# Altium PCB Buck Converter Rev 2.PcbDoc (part 2 of 2)
Units mil, origin at the board's own origin, x right, y up, seen from the top; angles counter-clockwise.
Board outline 6000 x 4000 mil, 10 copper layers (Top Layer, Int1 (GND), Int2 (Sign), Int3 (GND), Int4 (PWR), Int5 (PWR), Int6 (GND), Int7 (Sign), Int8 (GND), Bottom Layer), stack 61.78 mil thick; 38 components, 750 nets, 114 pads, 68 vias.
Unrouted connection lines stored in the file: 12.
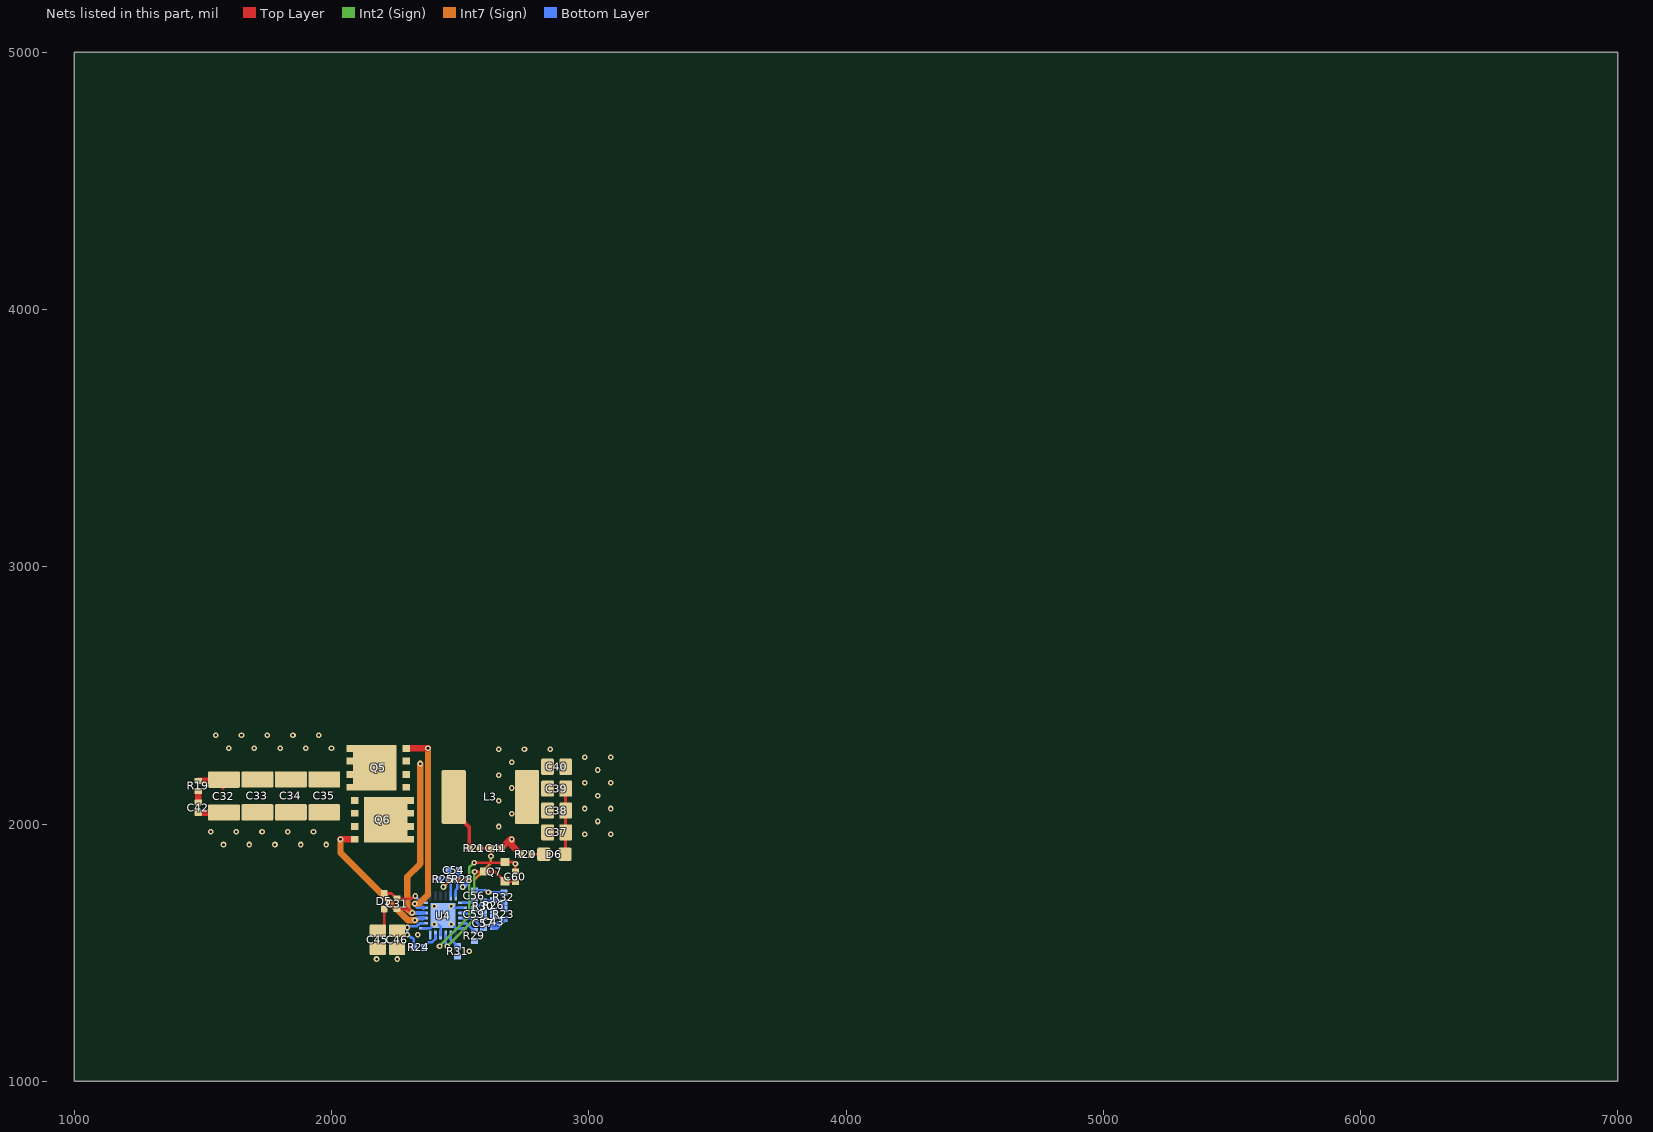
[diagram p10: the nets of this part, all layers, seen from the top]

## Part data
C31 C41: "0.22 µF ±10% 25V Ceramic Capacitor X5R 0402 (1005 Metric)", Capacitance=220nF, Capacitor Type=Ceramic, Manufacturer=Yageo, Manufacturer Part Number=CC0402KRX5R8BB224, Max Operating Temperature=125°C, Min Operating Temperature=-55°C, Negative Tolerance=5, Package Shape=Rectangular, Package Style=SMTMeter, Positive Tolerance=5%, Rated DC Voltage (URdc)=25V, Supplier Part Number 1=311-3341-1-ND, Temperature Characteristics Code=X5R, Category="Ceramic Capacitors", Dielectric Material=Ceramic, Height=0.5mm, JESD-609 Code=e3, Length=1mm, Mount="Surface Mount", Multilayer=Yes, Number of Pins=2, Pricing 1="1=0.10000, 10=0.04000, 50=0.02200, 100=0.01800, 500=0.01288, 1000=0.01012, 2500=0.00920, 5000=0.00846 (USD)", REACH SVHC=Yes, RoHS=Yes, RoHS Compliant=Yes, Size Code=0402, Supplier 1=Digi-Key, Termination=Wraparound, Width=0.5mm
C32 C33 C34 C35: "CAP CER 10UF 50V X7R 1210", Dielectric=X7R, Manufacturer 1="Murata Electronics", Manufacturer Part Number 1=GRM32ER71H106MA12L, Supplier Part Number 1=490-12775-1-ND, Voltage Rating=50V, Supplier 1=Digi-Key
C37 C38 C39 C40 C45 C46: "CAP CER 10UF 16V X5R 0805", Dielectric=X5R, Manufacturer 1=Yageo, Manufacturer Part Number 1=CC0805KKX5R7BB106, Package/Footprint=0805, Supplier Part Number 1=311-1865-1-ND, Voltage Rating=16V, Mounting Type=SMD, Supplier 1=Digi-Key
C42: "±10% 25V Ceramic Capacitor X5R 0402 (1005 Metric)", Capacitance=1uF, Manufacturer 1="TDK Corporation", Manufacturer Part Number 1=C1005X5R1E105K050BE, Package=0402, Supplier Part Number 1=445-175215-1-ND, Voltage=25V, Supplier 1=Digi-Key
C43: "180 pF ±10% 50V Ceramic Capacitor X7R 0402 (1005 Metric)", Capacitance=180pF, Manufacturer 1="AVX Corporation", Manufacturer Part Number 1=04025C181KAT2A, Package=0402, Supplier Part Number 1=478-1092-1-ND, Voltage=50V, Supplier 1=Digi-Key
C54: "100 pF ±10% 50V Ceramic Capacitor X7R 0402 (1005 Metric)", Capacitance=100pF, Manufacturer 1="AVX Corporation", Manufacturer Part Number 1=04025C101KAT2A, Package=0402, Supplier Part Number 1=478-1089-1-ND, Voltage=50V, Supplier 1=Digi-Key
C56: "0.027 µF ±10% 10V Ceramic Capacitor X7R 0402 (1005 Metric)", Capacitance=27nF, Capacitor Type=Ceramic, Manufacturer=Yageo, Manufacturer Part Number=CC0402KRX7R6BB273, Max Operating Temperature=125°C, Min Operating Temperature=-55°C, Negative Tolerance=10%, Package Shape=Rectangular, Package Style=SMTMeter, Rated DC Voltage (URdc)=10V, Supplier Part Number 1=311-3794-1-ND, Temperature Characteristics Code=X7R, Category="Ceramic Capacitors", Dielectric Material=Ceramic, Height=0.5mm, JESD-609 Code=e3, Length=1mm, Mount="Surface Mount", Multilayer=Yes, Number of Pins=2, Positive Tolerance=10%, Pricing 1="1=0.10000, 10=0.04000, 50=0.02200, 100=0.01800, 500=0.01288, 1000=0.01012, 2500=0.00920, 5000=0.00846 (USD)", REACH SVHC=Yes, RoHS=Yes, RoHS Compliant=Yes, Size Code=0402, Supplier 1=Digi-Key, Termination=Wraparound, Width=0.5mm
C57 C60: "1200 pF ±5% 50V Ceramic Capacitor X7R 0402 (1005 Metric)", Capacitance=1.2nF, Capacitor Type=Ceramic, Manufacturer=Yageo, Manufacturer Part Number=CC0402JRX7R9BB122, Max Operating Temperature=125°C, Min Operating Temperature=-55°C, Negative Tolerance=5, Package Shape=Rectangular, Package Style=SMTMeter, Positive Tolerance=5%, Rated DC Voltage (URdc)=50V, Supplier Part Number 1=311-3762-1-ND, Temperature Characteristics Code=X7R, Category="Ceramic Capacitors", Dielectric Material=Ceramic, Height=0.5mm, JESD-609 Code=e3, Length=1mm, Mount="Surface Mount", Multilayer=Yes, Number of Pins=2, Pricing 1="1=0.10000, 10=0.04000, 50=0.02200, 100=0.01800, 500=0.01288, 1000=0.01012, 2500=0.00920, 5000=0.00846 (USD)", REACH SVHC=Yes, RoHS=Yes, RoHS Compliant=Yes, Size Code=0402, Supplier 1=Digi-Key, Termination=Wraparound, Width=0.5mm
C59: "120 pF ±10% 50V Ceramic Capacitor X7R 0402 (1005 Metric)", Capacitance=120pF, Manufacturer 1="AVX Corporation", Manufacturer Part Number 1=04025C121KAT2A, Package=0402, Supplier Part Number 1=478-1090-1-ND, Voltage=50V, Supplier 1=Digi-Key
D5: library part DIO_30V_200mA, "Diode Super Barrier 30 V 200mA Surface Mount SOD-523", Manufacturer 1="Diodes Incorporated", Supplier Part Number 1=SBR0230T5-7TR-ND, Manufacturer Part Number 1=SBR0230T5-7, Supplier 1=Digi-Key
D6: "LED GREEN DIFFUSED 0805 SMD", Forward Voltage Drop=2.2V, Manufacturer 1=OSRAM, Manufacturer Part Number 1="LG R971-KN-1", Package/Footprint=0805, Supplier Part Number 1=475-1410-1-ND, Mounting Type=SMD, Supplier 1=Digi-Key
L3: "FIXED IND 2.2UH 14.5A 9.41 MOHM", Current Rating=14.5A, DC Resistance (DCR)=9.41mOhm, Inductance=2.2μH, Inductance Tolerance=20%, Manufacturer 1="Vishay Dale", Manufacturer Part Number 1=IHLP3232DZER2R2M11, Saturation Current=10.2A, Supplier Part Number 1=541-1350-1-ND, Test Frequency=100kHz, Mounting Type=SMD, Supplier 1=Digi-Key
Q5 Q6: "MOSFET N-CH 30V 60A 8VSON", Manufacturer 1="Texas Instruments", Manufacturer Part Number 1=CSD17577Q5AT, Package/Footprint=8-PowerTDFN, Supplier Part Number 1=296-38337-1-ND, Id=60A, Mounting Type=SMD, Supplier 1=Digi-Key, Vdss=30V, Verified=No, Vgs (Max)=±20V
Q7: "Bipolar (BJT) Transistor NPN 40 V 600 mA 250MHz 310 mW Surface Mount SOT-23-3", Current - Collector (Ic) (Max)=600mA, Current - Collector Cutoff (Max)=100nA, Frequency - Transition=250MHz, Manufacturer 1="Diodes Incorporated", Supplier Part Number 1=MMBT4401-FDICT-ND, Manufacturer Part Number 1=MMBT4401-7-F, Supplier 1=Digi-Key, Vce Saturation (Max) @ Ib, Ic="750mV @ 50mA, 500mA"
R19: "RES 2.21 OHM 1% 1/16W 0402", Manufacturer 1=Yageo, Manufacturer Part Number 1=RMCF0402FT2R21, Package/Footprint=0402, Power="0.063W, 1/16W", Supplier Part Number 1=RMCF0402FT2R21CT-ND, Tolerance=1%, Mounting Type=SMD, Supplier 1=Digi-Key
R20: "Fixed Resistor, Metal Glaze/thick Film, 0.063W, 1000ohm, 50V, 1% +/-Tol, 100ppm/Cel, Surface Mount, 0402", Manufacturer="Stackpole Electronics", Manufacturer Part Number=RMCF0402FT1K00, Max Operating Temperature=155°C, Min Operating Temperature=-55°C, Package Height=0.3mm, Package Length=1mm, Package Shape=Rectangular, Package Style=SMTMeter, Package Width=0.5mm, Rated Power Dissipation (P)=63mW, Rated Temperature=70°C, Resistance=1kΩ, Resistor Type="FIXED RESISTOR", Supplier Part Number 1=RMCF0402FT1K00CT-ND, Temperature Coefficient=100ppm/°C, Tolerance=1%, Working Voltage=50V, Category="Chip SMD Resistors", ComponentLink1Description=https://datasheet.ciiva.com:443/pdfs/VipMasterIC/IC/SEIE/SEIE-S-A0009541969/SEIE-S-A0009541969-1.pdf?src-supplier=IHS+Markit, ComponentLink1URL=https://datasheet.ciiva.com:443/pdfs/VipMasterIC/IC/SEIE/SEIE-S-A0009541969/SEIE-S-A0009541969-1.pdf?src-supplier=IHS+Markit, ComponentLink2Description=https://datasheet.ciiva.com/15193/getdatasheetpartid-365385-15193418.pdf?src-supplier=Verical, ComponentLink2URL=https://datasheet.ciiva.com/15193/getdatasheetpartid-365385-15193418.pdf?src-supplier=Verical, ComponentLink3Description=https://datasheet.ciiva.com/24336/sei-rmcp-24336266.pdf?src-supplier=Onlinecomponents.com, ComponentLink3URL=https://datasheet.ciiva.com/24336/sei-rmcp-24336266.pdf?src-supplier=Onlinecomponents.com, Construction=Rectangular, JESD-609 Code=e3, Mount="Surface Mount", Number of Pins=2, Packaging="Tape and Reel", Pricing 1="1=0.10000, 10=0.01500, 100=0.00610, 1000=0.00274, 2500=0.00238, 5000=0.00197 (USD)", REACH SVHC=Yes, Reference Standard=AEC-Q200, RoHS=Yes, RoHS Compliant=Yes, Size Code=0402, Stock 1=277, Supplier 1=Digi-Key, Technology="METAL GLAZE/THICK FILM", Terminal Finish=Nickel, Termination=Wraparound
R21: "RES SMD 845 OHM 1% 1/16W 0402", Manufacturer 1="Vishay Dale", Manufacturer Part Number 1=CRCW0402845RFKED, Package/Footprint=0402, Power="0.063W, 1/16W", Supplier Part Number 1=541-845LCT-ND, Tolerance=1%, Mounting Type=SMD, Supplier 1=Digi-Key
R23: "RES SMD 20K OHM 1% 1/16W 0402", Manufacturer 1=Yageo, Manufacturer Part Number 1=RC0402FR-0720KL, Package/Footprint=0402, Power="0.063W, 1/16W", Supplier Part Number 1=311-20.0KLRCT-ND, Tolerance=1%, Mounting Type=SMD, Supplier 1=Digi-Key
R24: "RES SMD 56.2K OHM 1% 1/16W 0402", Manufacturer 1=Yageo, Manufacturer Part Number 1=RC0402FR-0756K2L, Package/Footprint=0402, Power="0.063W, 1/16W", Supplier Part Number 1=YAG3187CT-ND, Tolerance=1%, Mounting Type=SMD, Supplier 1=Digi-Key
R25 R28: "RES 7.87K OHM 1% 1/16W 0402", Manufacturer 1="Vishay Dale", Manufacturer Part Number 1=RMCF0402FT7K87, Package/Footprint=0402, Power="0.063W, 1/16W", Supplier Part Number 1=RMCF0402FT7K87CT-ND, Tolerance=1%, Mounting Type=SMD, Supplier 1=Digi-Key
R26: "RES SMD 124 OHM 1% 1/16W 0402", Manufacturer 1="Vishay Dale", Manufacturer Part Number 1=RC0402FR-07124RL, Package/Footprint=0402, Power="0.063W, 1/16W", Supplier Part Number 1=311-124LRCT-ND, Tolerance=1%, Mounting Type=SMD, Supplier 1=Digi-Key
R29: "RES 11K OHM 1% 1/16W 0402", Manufacturer 1="Stackpole Electronics Inc", Manufacturer Part Number 1=RMCF0402FT11K0, Package/Footprint=0402, Power="0.063W, 1/16W", Supplier Part Number 1=RMCF0402FT11K0CT-ND, Tolerance=1%, Mounting Type=SMD, Supplier 1=Digi-Key
R30: "RES SMD 3.48K OHM 1% 1/16W 0402", Manufacturer 1="Vishay Dale", Manufacturer Part Number 1=RC0402FR-073K48L, Package/Footprint=0402, Power="0.063W, 1/16W", Supplier Part Number 1=YAG3148CT-ND, Tolerance=1%, Mounting Type=SMD, Supplier 1=Digi-Key
R31: "RES SMD 86.6K OHM 1% 1/16W 0402", Manufacturer 1=Yageo, Manufacturer Part Number 1=RC0402FR-0786K6L, Package/Footprint=0402, Power="0.063W, 1/16W", Supplier Part Number 1=YAG3249CT-ND, Tolerance=1%, Mounting Type=SMD, Supplier 1=Digi-Key
R32: "RES 4.42K OHM 1% 1/16W 0402", Manufacturer 1="Stackpole Electronics Inc", Manufacturer Part Number 1=RMCF0402FT4K42, Package/Footprint=0402, Power="0.063W, 1/16W", Supplier Part Number 1=RMCF0402FT4K42CT-ND, Tolerance=1%, Mounting Type=SMD, Supplier 1=Digi-Key
U4: "Buck Regulator Positive Output Step-Down - DC-DC Controller IC 24-WQFN (4x4)", Manufacturer 1="Texas Instruments", Package="24-WQFN Exposed Pad", Supplier Part Number 1=296-37066-1-ND, Supply Voltage="3V - 20V", Switching Frequency="200kHz - 1.2MHz", Manufacturer Part Number 1=LM27403SQE/NOPB, Max Duty Cycle=93%, Supplier 1=Digi-Key

## Via types
v1: diameter 22, hole 10, Top Layer to Bottom Layer, 68 vias

## Nets (pads, with @x,y where several pads share a name; then routed paths per layer and width w, separated by ;. In a path a pad name is that pad's centre, name@x,y a point inside that pad or via, vN(x,y) a via of type N, cw(c..) or ccw(c..) an arc to the next point about the centre after c; other vN are vias at no path point)
1.8V: 
1V2: 
1V8: 
2V5: 
3V3: C37.2 C38.2 C39.2 C40.2 C41.2 C43.2 L3.1 R20.2 R23.2 R28.2 | length 217.7
  Top Layer w25: C41.2@2660.32,1905 2660.32,1905.59 2694.72,1940 v1(2700,1940) 2700,1918.31 2733.9,1884.41 2734.49,1884.41 2735.87,1883.03 R20.2@2735.87,1882.44
  Bottom Layer w25: v1(2510,1755) 2510,1756.8 2518.63,1765.42 2518.63,1773.35 2529.68,1784.41 R28.2@2529.68,1785 ; C43.2@2630,1600.63 2630.69,1601.32 2640.41,1601.32 2669.41,1630.32 R23.2@2670,1630.32
  other v1: 2650,1990 2700,2040 2650,2090 2700,2140 2650,2190 2700,2240 2650,2290 2750,2290 2850,2290
3V3OUT: 
5V: 
5V_HDMI: 
5V_USB1: 
5V_USB2: 
+RTC_AGX: 
CANA_N: 
CANA_P: 
CANB_N: 
CANB_P: 
CBOOT: C31.1 D5.1 U4.18 | length 179.9
  Top Layer w10: D5.1@2205,1729.92 2232.8,1729.92 2253.03,1709.68 C31.1@2255,1709.68 2311.44,1709.68 2321.75,1720 v1(2325,1720)
  Bottom Layer w10: v1(2325,1720) 2344.72,1700.28 2344.72,1693.54 2344.84,1693.43 U4.18@2357.24,1693.43
CHASSIS: 
FGND: 
GND: C32.1 C33.1 C34.1 C35.1 C37.1 C38.1 C39.1 C40.1 C42.1 C45.1 C46.1 C56.1 C60.1 D6.2 Q6.1 Q7.2 R29.1 R31.1 R32.1 U4.2 U4.6 U4.10 U4.13 U4.25 | length 1258.2
  Top Layer w10: C32.1@1581.14,2043.61 C32.1@1581.85,2044.32 ; v1(2555,1850) 2671.97,1850 Q7.2@2674.37,1852.4 2704.35,1852.4 2711.75,1845 v1(2715,1845) C60.1@2715,1814.68 ; D6.2@2907.91,1882.44 2909.47,1884 2909.47,2136.67 C39.1@2910.24,2137.44
  Top Layer w25: C42.1@1481.85,2043.61 C32.1@1581.14,2043.61
  Int2 (Sign) w10: v1(2420,1525) 2535,1640 2535,1830 v1(2555,1850)
  Bottom Layer w10: U4.13@2357.24,1595 2384.54,1595 2390.39,1600.86 2390.39,1600.98 2399.41,1610 v1(2400,1610) 2414.76,1610 2423.78,1600.98 U4.10@2423.78,1567.83 ; v1(2465,1610) 2467.83,1610 2476.85,1600.98 2476.85,1600.86 2482.71,1595 U4.6@2510,1595 ; v1(2465,1680) 2471.26,1673.74 U4.2@2510,1673.74 ; C56.1@2555,1741.68 2600.07,1741.68 2606.75,1735 v1(2610,1735) 2610.32,1734.68 2669.68,1734.68 R32.1@2670,1734.37
  other v1: 2175,1475 2255,1475 2535,1505 2335,1570 2433.62,1644.21 2400,1680 1580,1920 1680,1920 1780,1920 1880,1920 1980,1920 2985,1960 3085,1960 1530,1970 1630,1970 1730,1970 1830,1970 1930,1970 3035,2010 2985,2060 3085,2060 3035,2110 2985,2160 3085,2160 3035,2210 2985,2260 3085,2260
GPIO20_5V0_HDMI_EN: 
I2C_GP2_CLK_3V3: 
I2C_GP2_DAT_3V3: 
I2C_GP5_CLK_3V3: 
I2C_GPS_DAT_3V3: 
MODE0: 
MODE1: 
MODE2: 
MODE3: 
NetC2_1: 
NetC2_2: 
NetC10_1: 
NetC10_2: 
NetC11_1: 
NetC12_2: 
NetC13_1: 
NetC14_1: 
NetC15_2: 
NetC23_2: 
NetC24_1: 
NetC24_2: 
NetC25_2: 
NetC26_2: 
NetC27_1: 
NetC27_2: 
NetC28_2: 
NetC29_2: 
NetC30_2: 
NetC36_1: 
NetC36_2: 
NetC41_1: C41.1 R21.2 R25.2 | length 364.2
  Top Layer w10: R21.2@2575,1905 C41.1@2620.95,1905 2620.47,1904.53 2620.47,1875.47 v1(2620,1875)
  Int7 (Sign) w10: v1(2435,1755) 2462.54,1782.54 2553.23,1782.54 2619.7,1849 2619.7,1874.7 v1(2620,1875)
  Bottom Layer w10: R25.2@2415.32,1785 2415.32,1783.03 2432.7,1765.64 2432.7,1757.3 v1(2435,1755)
NetC42_2: C42.2 R19.1 U4.12 | length 45.3
  Top Layer w25: C42.2@1481.85,2082.98 R19.1@1481.85,2128.29
NetC43_1: C43.1 R26.2 | length 25
  Bottom Layer w10: C43.1@2630,1640 R26.2@2630,1665
NetC44_1: 
NetC53_2: 
NetC54_1: C54.1 R28.1 U4.24 | length 104.3
  Bottom Layer w10: U4.24@2482.83,1720.59 2482.95,1720.71 2482.95,1743.25 2488.5,1748.8 2488.5,1783.18 2492.5,1787.18 2492.5,1817.82 C54.1@2494.68,1820
NetC54_2: C54.2 R25.1 U4.23 | length 103.2
  Bottom Layer w10: C54.2@2455.32,1820 2455,1819.68 2455,1785.32 R25.1@2454.68,1785 2454.68,1783.03 2463.15,1774.57 U4.23@2463.15,1720.59
NetC55_2: 
NetC56_2: C56.2 U4.1 | length 48.7
  Bottom Layer w10: U4.1@2510,1693.43 2544.14,1693.43 2553.03,1702.32 C56.2@2555,1702.32
NetC57_1: C57.1 C59.1 U4.4 | length 98.5
  Bottom Layer w10: U4.4@2510,1634.37 2510.12,1634.25 2551.06,1634.25 C59.1@2555,1630.32 2556.97,1630.32 2563.78,1623.5 2563.78,1619.57 2588.03,1595.32 C57.1@2590,1595.32
NetC57_2: C57.2 R30.1 | length 25.3
  Bottom Layer w10: C57.2@2590,1634.68 R30.1@2590,1660
NetC58_2: R31.2 U4.8 | length 55.4
  Bottom Layer w10: U4.8@2463.15,1567.83 2463.27,1567.72 2463.27,1551.42 2481.22,1533.46 2481.22,1531.5 2488.03,1524.68 R31.2@2490,1524.68
NetC59_2: C59.2 R23.1 R26.1 R30.2 R32.2 U4.3 | length 212
  Bottom Layer w10: U4.3@2510,1654.06 2539.37,1654.06 2546.22,1660.91 2546.22,1662.87 2553.03,1669.68 C59.2@2555,1669.68 2556.97,1669.68 2568.79,1681.5 2571.47,1681.5 2581.22,1691.25 2581.22,1692.56 2588.03,1699.37 R30.2@2590,1699.37 2592.5,1701.87 2627.5,1701.87 R26.1@2630,1704.37 2658.66,1704.37 2668.03,1695 R32.2@2670,1695 R23.1@2670,1669.68
NetC60_2: C60.2 Q7.1 Q7.3 U4.9 | length 554.9
  Top Layer w10: v1(2556,1815) Q7.3@2595.63,1815 2635,1815 2672.4,1777.6 Q7.1@2674.37,1777.6 2676.65,1775.32 C60.2@2715,1775.32
  Int2 (Sign) w10: v1(2449.99,1524.99) 2555,1630 2555,1814 v1(2556,1815)
  Bottom Layer w10: U4.9@2443.46,1567.83 2443.46,1533.43 2449.99,1526.9 v1(2449.99,1524.99)
NetC129_2: 
NetC134_2: 
NetC154_2: 
NetC155_2: 
NetC156_2: 
NetC159_1: 
NetC160_1: 
NetC164_1: 
NetC165_1: 
NetC183_2: 
NetC184_2: 
NetC185_2: 
NetC186_2: 
NetC187_2: 
NetC188_2: 
NetC211_2: 
NetC212_2: 
NetC213_2: 
NetC214_2: 
NetC217_2: 
NetC252_2: 
NetC268_2: 
NetD1_1: 
NetD2_1: 
NetD4_1: 
NetD6_1: D6.1 R20.1 | length 50
  Top Layer w10: R20.1@2775.24,1882.44 D6.1@2825.24,1882.44
NetD7_2: 
NetD9_3: 
NetD12_1: 
NetD12_3: 
NetD13_1: 
NetD13_2: 
NetD13_4: 
NetD13_5: 
NetD13_7: 
NetD13_8: 
NetD13_10: 
NetD13_11: 
NetD13_15: 
NetD13_17: 
NetD14_2: 
NetD15_1: 
NetD16_1: 
NetJ5_13: 
NetJ5_14: 
NetJ5_15: 
NetJ5_16: 
NetJ5_17: 
NetJ6_14: 
NetJ6_16: 
NetJ7_8: 
NetJ7_10: 
NetJ7_12: 
NetJ7_14: 
NetJ7_21: 
NetJ7_23: 
NetJ7_38: 
NetJ7_56: 
NetJ7_59: 
NetJ7_62: 
NetJ8_5: 
NetJ8_7: 
NetJ8_10: 
NetJ8_11: 
NetJ8_13: 
NetJ8_17: 
NetJ8_19: 
NetJ8_23: 
NetJ8_25: 
NetJ8_29: 
NetJ8_31: 
NetJ8_35: 
NetJ8_37: 
NetJ8_41: 
NetJ8_43: 
NetJ8_47: 
NetJ8_49: 
NetJ8_50: 
NetJ8_52: 
NetJ8_53: 
NetJ8_54: 
NetJ8_55: 
NetJ9_16: 
NetL5_1: 
NetP1_A53: 
NetP1_C53: 
NetQ2_2: 
NetQ3_2: 
NetQ5_2: Q5.2 U4.17 | length 761.9
  Top Layer w25: Q5.2@2290.06,2293.92 2373.92,2293.92 v1(2375,2295)
  Int7 (Sign) w25: v1(2323.72,1690) 2339.7,1690 2375,1725.31 v1(2375,2295)
  Bottom Layer w15: v1(2323.72,1690) 2323.72,1688.79 2336.4,1676.12 2354.86,1676.12 U4.17@2357.24,1673.74
NetQ6_2: Q6.2 U4.15 | length 542.5
  Top Layer w25: v1(2035,1940) 2035.49,1940.49 Q6.2@2090,1940.49
  Int7 (Sign) w25: v1(2035,1940) 2035,1888.36 2297.36,1626 2324.25,1626 v1@2325.53,1626
  Bottom Layer w15: v1(2324.25,1626) 2326.15,1626 2332.14,1631.99 2354.86,1631.99 U4.15@2357.24,1634.37
NetQ8_1: 
NetQ8_3: 
NetQ9_1: 
NetQ11_1: 
NetQ11_3: 
NetQ14_3: 
NetQ15_2: 
NetR1_1: 
NetR3_1: 
NetR10_2: 
NetR15_2: 
NetR24_2: R24.2 U4.11 | length 74.1
  Bottom Layer w10: R24.2@2359.68,1520 2359.68,1521.97 2377.98,1540.27 2391.46,1540.27 2403.98,1552.79 2403.98,1567.72 U4.11@2404.09,1567.83
NetR29_2: R29.2 U4.5 | length 58.5
  Bottom Layer w10: U4.5@2510,1614.68 2522.4,1614.68 2527.97,1609.12 2530.5,1609.12 2546.22,1593.4 2546.22,1591.5 2553.03,1584.68 R29.2@2555,1584.68
NetR48_1: 
NetR49_2: 
NetR50_2: 
NetR51_2: 
NetR53_1: 
NetR54_1: 
NetR55_1: 
NetR56_1: 
NetR78_1: 
NetR79_1: 
NetR80_1: 
NetR85_1: 
NetR88_1: 
NetR90_2: 
NetR91_2: 
NetR92_1: 
NetR93_2: 
NetR94_1: 
NetR95_2: 
NetR96_2: 
NetR97_2: 
NetR98_2: 
NetR99_2: 
NetR100_2: 
NetR106_2: 
NetR107_2: 
NetR108_2: 
NetR109_2: 
NetR116_1: 
NetR132_1: 
NetR139_1: 
NetR167_1: 
NetR168_1: 
NetR169_1: 
NetR174_2: 
NetR175_2: 
NetR176_2: 
NetR177_2: 
NetR178_1: 
NetR179_1: 
NetR180_1: 
NetR183_1: 
NetR184_2: 
NetR187_2: 
NetU9_47: 
NetU11_46: 
NetU12_10: 
NetU12_11: 
NetU12_12: 
NetU12_13: 
NetU13_4: 
NetU14_2: 
NetU14_3: 
NetU21_3: 
NetU23_3: 
NetU23_4: 
NetU23_5: 
NV0HS0.RX_N: 
NV0HS0.RX_P: 
NV0HS0.TX_N: 
NV0HS0.TX_P: 
NV0HS0_TX_N: 
NV0HS0_TX_P: 
NV0HS1.RX_N: 
NV0HS1.RX_P: 
NV0HS1.TX_N: 
NV0HS1.TX_P: 
NV0HS1_TX_N: 
NV0HS1_TX_P: 
NV0HS2.RX_N: 
NV0HS2.RX_P: 
NV0HS2.TX_N: 
NV0HS2.TX_P: 
NV0HS2_TX_N: 
NV0HS2_TX_P: 
NV0HS3.RX_N: 
NV0HS3.RX_P: 
NV0HS3.TX_N: 
NV0HS3.TX_P: 
NV0HS3_TX_N: 
NV0HS3_TX_P: 
NV0HS4.RX_N: 
NV0HS4.RX_P: 
NV0HS4.TX_N: 
NV0HS4.TX_P: 
NV0HS4_TX_N: 
NV0HS4_TX_P: 
NV0HS5.RX_N: 
NV0HS5.RX_P: 
NV0HS5.TX_N: 
NV0HS5.TX_P: 
NV0HS5_TX_N: 
NV0HS5_TX_P: 
NV0HS6.RX_N: 
NV0HS6.RX_P: 
NV0HS6.TX_N: 
NV0HS6.TX_P: 
NV0HS6_TX_N: 
NV0HS6_TX_P: 
NV0HS7.RX_N: 
NV0HS7.RX_P: 
NV0HS7.TX_N: 
NV0HS7.TX_P: 
NV0HS7_TX_N: 
NV0HS7_TX_P: 
NV0HS_CLK0.REFCLK_N: 
NV0HS_CLK0.REFCLK_P: 
NV0HS_CLK1.REFCLK_N: 
NV0HS_CLK1.REFCLK_P: 
NV1HS0.RX_N: 
NV1HS0.RX_P: 
NV1HS0.TX_N: 
NV1HS0.TX_P: 
NV1HS0_TX_N: 
NV1HS0_TX_P: 
NV1HS1.RX_N: 
NV1HS1.RX_P: 
NV1HS1.TX_N: 
NV1HS1.TX_P: 
NV1HS1_TX_N: 
NV1HS1_TX_P: 
NV1HS2.RX_N: 
NV1HS2.RX_P: 
NV1HS2.TX_N: 
NV1HS2.TX_P: 
NV1HS2_TX_N: 
NV1HS2_TX_P: 
NV1HS3.RX_N: 
NV1HS3.RX_P: 
NV1HS3.TX_N: 
NV1HS3.TX_P: 
NV1HS3_TX_N: 
NV1HS3_TX_P: 
NV1HS4.RX_N: 
NV1HS4.RX_P: 
NV1HS4.TX_N: 
NV1HS4.TX_P: 
NV1HS4_TX_N: 
NV1HS4_TX_P: 
NV1HS5.RX_N: 
NV1HS5.RX_P: 
NV1HS5.TX_N: 
NV1HS5.TX_P: 
NV1HS5_TX_N: 
NV1HS5_TX_P: 
NV1HS6.RX_N: 
NV1HS6.RX_P: 
NV1HS6.TX_N: 
NV1HS6.TX_P: 
NV1HS6_TX_N: 
NV1HS6_TX_P: 
NV1HS7.RX_N: 
NV1HS7.RX_P: 
NV1HS7.TX_N: 
NV1HS7.TX_P: 
NV1HS7_TX_N: 
NV1HS7_TX_P: 
NV1HS_CLK0.REFCLK_N: 
NV1HS_CLK0.REFCLK_P: 
NV1HS_CLK1.REFCLK_N: 
NV1HS_CLK1.REFCLK_P: 
NV_CAM_MCLK1: 
NV_CAM_MCLK2: 
NV_CAM_MCLK3: 
NV_CAM_MCLK4: 
NV_CAM_MCLK5: 
NV_CAN0.DATA_IN: 
NV_CAN0.DATA_OUT: 
NV_CAN1.DATA_IN: 
NV_CAN1.DATA_OUT: 
NV_CSI0.CLK_N: 
NV_CSI0.CLK_P: 
NV_CSI0.DATA0_N: 
NV_CSI0.DATA0_P: 
NV_CSI0.DATA1_N: 
NV_CSI0.DATA1_P: 
NV_CSI1.CLK_N: 
NV_CSI1.CLK_P: 
NV_CSI1.DATA0_N: 
NV_CSI1.DATA0_P: 
NV_CSI1.DATA1_N: 
NV_CSI1.DATA1_P: 
NV_CSI2.CLK_N: 
NV_CSI2.CLK_P: 
NV_CSI2.DATA0_N: 
NV_CSI2.DATA0_P: 
NV_CSI2.DATA1_N: 
NV_CSI2.DATA1_P: 
NV_CSI3.CLK_N: 
NV_CSI3.CLK_P: 
NV_CSI3.DATA0_N: 
NV_CSI3.DATA0_P: 
NV_CSI3.DATA1_N: 
NV_CSI3.DATA1_P: 
NV_CSI4.CLK_N: 
NV_CSI4.CLK_P: 
NV_CSI4.DATA0_N: 
NV_CSI4.DATA0_P: 
NV_CSI4.DATA1_N: 
NV_CSI4.DATA1_P: 
NV_CSI5.CLK_N: 
NV_CSI5.CLK_P: 
NV_CSI5.DATA0_N: 
NV_CSI5.DATA0_P: 
NV_CSI5.DATA1_N: 
NV_CSI5.DATA1_P: 
NV_CSI6.CLK_N: 
NV_CSI6.CLK_P: 
NV_CSI6.DATA0_N: 
NV_CSI6.DATA0_P: 
NV_CSI6.DATA1_N: 
NV_CSI6.DATA1_P: 
NV_CSI7.CLK_N: 
NV_CSI7.CLK_P: 
NV_CSI7.DATA0_N: 
NV_CSI7.DATA0_P: 
NV_CSI7.DATA1_N: 
NV_CSI7.DATA1_P: 
NV_DBG_SEL: 
NV_DP0.AUX_N: 
NV_DP0.AUX_P: 
NV_DP0.HPD: 
NV_DP0.TX0_N: 
NV_DP0.TX0_P: 
NV_DP0.TX1_N: 
NV_DP0.TX1_P: 
NV_DP0.TX2_N: 
NV_DP0.TX2_P: 
NV_DP0.TX3_N: 
NV_DP0.TX3_P: 
NV_DP1.AUX_N: 
NV_DP1.AUX_P: 
NV_DP1.HPD: 
NV_DP1.TX0_N: 
NV_DP1.TX0_P: 
NV_DP1.TX1_N: 
NV_DP1.TX1_P: 
NV_DP1.TX2_N: 
NV_DP1.TX2_P: 
NV_DP1.TX3_N: 
NV_DP1.TX3_P: 
NV_DP2.AUX_N: 
NV_DP2.AUX_P: 
NV_DP2.HPD: 
NV_DP2.TX0_N: 
NV_DP2.TX0_P: 
NV_DP2.TX1_N: 
NV_DP2.TX1_P: 
NV_DP2.TX2_N: 
NV_DP2.TX2_P: 
NV_DP2.TX3_N: 
NV_DP2.TX3_P: 
NV_DP2_HPD: 
NV_FAN.PWM: 
NV_FAN.TACH: 
NV_GPIO.GPIO01: 
NV_GPIO.GPIO02: 
NV_GPIO.GPIO03: 
NV_GPIO.GPIO04: 
NV_GPIO.GPIO05: 
NV_GPIO.GPIO06: 
NV_GPIO.GPIO07: 
NV_GPIO.GPIO08: 
NV_GPIO.GPIO09: 
NV_GPIO.GPIO10: 
NV_GPIO.GPIO11: 
NV_GPIO.GPIO12: 
NV_GPIO.GPIO13: 
NV_GPIO.GPIO14: 
NV_GPIO.GPIO15: 
NV_GPIO.GPIO16: 
NV_GPIO.GPIO17: 
NV_GPIO.GPIO18: 
NV_GPIO.GPIO19: 
NV_GPIO.GPIO20: 
NV_GPIO.GPIO21: 
NV_GPIO.GPIO22: 
NV_GPIO.GPIO23: 
NV_GPIO.GPIO24: 
NV_GPIO.GPIO25: 
NV_GPIO.GPIO26: 
NV_GPIO.GPIO27: 
NV_GPIO.GPIO28: 
NV_GPIO.GPIO29: 
NV_GPIO.GPIO30: 
NV_GPIO.GPIO31: 
NV_GPIO.GPIO32: 
NV_GPIO.GPIO33: 
NV_GPIO.GPIO34: 
NV_GPIO.GPIO35: 
NV_GPIO.GPIO36: 
NV_HDMI_CEC: 
NV_HDMI_CEC_CON: 
NV_HDMI_DDC_CLK: 
NV_HDMI_DDC_DATA: 
NV_HDMI_TMDS0_N: 
NV_HDMI_TMDS0_P: 
NV_HDMI_TMDS1_N: 
NV_HDMI_TMDS1_P: 
NV_HDMI_TMDS2_N: 
NV_HDMI_TMDS2_P: 
NV_HDMI_TMDSCLK_N: 
NV_HDMI_TMDSCLK_P: 
NV_I2C1.CLK: 
NV_I2C1.DATA: 
NV_I2C2.CLK: 
NV_I2C2.DATA: 
NV_I2C3.CLK: 
NV_I2C3.DATA: 
NV_I2C4.CLK: 
NV_I2C4.DATA: 
NV_I2S0.CLK: 
NV_I2S0.DATA_IN: 
NV_I2S0.DATA_OUT: 
NV_I2S0.FRAME_SYNC: 
NV_I2S1.CLK: 
NV_I2S1.DATA_IN: 
NV_I2S1.DATA_OUT: 
NV_I2S1.FRAME_SYNC: 
NV_I2S2.CLK: 
NV_I2S2.DATA_IN: 
NV_I2S2.DATA_OUT: 
NV_I2S2.FRAME_SYNC: 
NV_JTAG.TCK: 
NV_JTAG.TDI: 
NV_JTAG.TDO: 
NV_JTAG.TMS: 
NV_JTAG.TRST_N: 
NV_JTAG_SEL: 
NV_MOD_PRSNT.PRSNT_OUT: 
NV_PCIE_CTRL0.CLK_N: 
NV_PCIE_CTRL0.CLK_P: 
NV_PCIE_CTRL0.CLKREQ_N: 
NV_PCIE_CTRL0.RST_N: 
NV_PCIE_CTRL1.CLK_N: 
NV_PCIE_CTRL1.CLK_P: 
NV_PCIE_CTRL1.CLKREQ_N: 
NV_PCIE_CTRL1.RST_N: 
NV_PCIE_CTRL2.CLK_N: 
NV_PCIE_CTRL2.CLK_P: 
NV_PCIE_CTRL2.CLKREQ_N: 
NV_PCIE_CTRL2.RST_N: 
NV_PCIE_CTRL3.CLK_N: 
NV_PCIE_CTRL3.CLK_P: 
NV_PCIE_CTRL3.CLKREQ_N: 
NV_PCIE_CTRL3.RST_N: 
NV_PCIE_CTRL4.CLK_N: 
NV_PCIE_CTRL4.CLK_P: 
NV_PCIE_CTRL4.CLKREQ_N: 
NV_PCIE_CTRL4.RST_N: 
NV_PCIE_CTRL5.CLK_N: 
NV_PCIE_CTRL5.CLK_P: 
NV_PCIE_CTRL5.CLKREQ_N: 
NV_PCIE_CTRL5.RST_N: 
NV_PCIE_WAKE_N: 
NV_PWM01: 
NV_RGMII.INT_N: 
NV_RGMII.MDC: 
NV_RGMII.MDIO: 
NV_RGMII.RST_N: 
NV_RGMII.RX_CLK: 
NV_RGMII.RX_DATA0: 
NV_RGMII.RX_DATA1: 
NV_RGMII.RX_DATA2: 
NV_RGMII.RX_DATA3: 
NV_RGMII.RX_EN: 
NV_RGMII.TX_CLK: 
NV_RGMII.TX_DATA0: 
NV_RGMII.TX_DATA1: 
NV_RGMII.TX_DATA2: 
NV_RGMII.TX_DATA3: 
NV_RGMII.TX_EN: 
NV_SDIO.CLK: 
NV_SDIO.CMD: 
NV_SDIO.DATA0: 
NV_SDIO.DATA1: 
NV_SDIO.DATA2: 
NV_SDIO.DATA3: 
NV_SPI1.CLK: 
NV_SPI1.CS0_N: 
NV_SPI1.CS1_N: 
NV_SPI1.MISO: 
NV_SPI1.MOSI: 
NV_SPI2.CLK: 
NV_SPI2.CS0_N: 
NV_SPI2.MISO: 
NV_SPI2.MOSI: 
NV_SPI3.CLK: 
NV_SPI3.CS0_N: 
NV_SPI3.CS1_N: 
NV_SPI3.MISO: 
NV_SPI3.MOSI: 
NV_SYS.CARRIER_PWR_ON: 
NV_SYS.FORCE_RECOV_N: 
NV_SYS.MODULE_PWR_ON: 
NV_SYS.OVERTEMP_N: 
NV_SYS.PWR_BTN_N: 
NV_SYS.PWR_GOOD: 
NV_SYS.RST_IN_N: 
NV_SYS.RST_OUT_N: 
NV_SYS.SPU_GPIO: 
NV_SYS.STBY_ACK_N: 
NV_SYS.STBY_REQ_N: 
NV_SYS.SYSTEM_OC_N: 
NV_SYS.TEMP_ALERT_N: 
NV_SYS.VCOMP_ALERT_N: 
NV_SYS.WDT_RST_OUT_N: 
NV_UART1.CTS: 
NV_UART1.RTS: 
NV_UART1.RX: 
NV_UART1.TX: 
NV_UART2.CTS: 
NV_UART2.RTS: 
NV_UART2.RX: 
NV_UART2.TX: 
NV_UART3_DEBUG.RX: 
NV_UART3_DEBUG.TX: 
NV_UART4.CTS: 
NV_UART4.RTS: 
NV_UART4.RX: 
NV_UART4.TX: 
NV_UART5.CTS: 
NV_UART5.RTS: 
NV_UART5.RX: 
NV_UART5.TX: 
NV_UFS_CTRL.CLK: 
NV_UFS_CTRL.RST_N: 
NV_UPHY0.RX_N: 
NV_UPHY0.RX_P: 
NV_UPHY0.TX_N: 
NV_UPHY0.TX_P: 
NV_UPHY0_TX_N: 
NV_UPHY0_TX_P: 
NV_UPHY1.RX_N: 
NV_UPHY1.RX_P: 
NV_UPHY1.TX_N: 
NV_UPHY1.TX_P: 
NV_UPHY1_TX_N: 
NV_UPHY1_TX_P: 
NV_UPHY2.RX_N: 
NV_UPHY2.RX_P: 
NV_UPHY2.TX_N: 
NV_UPHY2.TX_P: 
NV_UPHY2_TX_N: 
NV_UPHY2_TX_P: 
NV_UPHY3.RX_N: 
NV_UPHY3.RX_P: 
NV_UPHY3.TX_N: 
NV_UPHY3.TX_P: 
NV_UPHY3_TX_N: 
NV_UPHY3_TX_P: 
NV_UPHY4.RX_N: 
NV_UPHY4.RX_P: 
NV_UPHY4.TX_N: 
NV_UPHY4.TX_P: 
NV_UPHY4_TX_N: 
NV_UPHY4_TX_P: 
NV_UPHY5.RX_N: 
NV_UPHY5.RX_P: 
NV_UPHY5.TX_N: 
NV_UPHY5.TX_P: 
NV_UPHY5_TX_N: 
NV_UPHY5_TX_P: 
NV_UPHY6.RX_N: 
NV_UPHY6.RX_P: 
NV_UPHY6.TX_N: 
NV_UPHY6.TX_P: 
NV_UPHY6_TX_N: 
NV_UPHY6_TX_P: 
NV_UPHY7.RX_N: 
NV_UPHY7.RX_P: 
NV_UPHY7.TX_N: 
NV_UPHY7.TX_P: 
NV_UPHY7_TX_N: 
NV_UPHY7_TX_P: 
NV_UPHY8.RX_N: 
NV_UPHY8.RX_P: 
NV_UPHY8.TX_N: 
NV_UPHY8.TX_P: 
NV_UPHY8_TX_N: 
NV_UPHY8_TX_P: 
NV_UPHY9.RX_N: 
NV_UPHY9.RX_P: 
NV_UPHY9.TX_N: 
NV_UPHY9.TX_P: 
NV_UPHY9_TX_N: 
NV_UPHY9_TX_P: 
NV_UPHY10.RX_N: 
NV_UPHY10.RX_P: 
NV_UPHY10.TX_N: 
NV_UPHY10.TX_P: 
NV_UPHY10_TX_N: 
NV_UPHY10_TX_P: 
NV_UPHY11.RX_N: 
NV_UPHY11.RX_P: 
NV_UPHY11.TX_N: 
NV_UPHY11.TX_P: 
NV_UPHY11_TX_N: 
NV_UPHY11_TX_P: 
NV_UPHY_CLK1.REFCLK_N: 
NV_UPHY_CLK1.REFCLK_P: 
NV_UPHY_CLK2.REFCLK_N: 
NV_UPHY_CLK2.REFCLK_P: 
NV_USB0.DATA_N: 
NV_USB0.DATA_P: 
NV_USB1.DATA_N: 
NV_USB1.DATA_P: 
NV_USB2.DATA_N: 
NV_USB2.DATA_P: 
NV_USB3.DATA_N: 
NV_USB3.DATA_P: 
PCIE_TRA_N: 
PCIE_TRA_P: 
PCIE_TRB_N: 
PCIE_TRB_P: 
PCIE_TRC_N: 
PCIE_TRC_P: 
PCIE_TRD_N: 
PCIE_TRD_P: 
PHYAD0: 
PHYAD1: 
PHYAD2: 
RGMII_TRA_N: 
RGMII_TRA_P: 
RGMII_TRB_N: 
RGMII_TRB_P: 
RGMII_TRC_N: 
RGMII_TRC_P: 
RGMII_TRD_N: 
RGMII_TRD_P: 
RXLED#: 
SATA_DEV_SLP: 
SW: C31.2 L3.2 Q5.1 Q6.3 R21.1 U4.16 | length 945.1
  Top Layer w15: C31.2@2255,1670.32 2296.31,1670.32 2311.62,1655 v1(2313.52,1655) ; L3.2@2475,2105 2475,2047.5 2535.63,1986.87 R21.1@2535.63,1905
  Int7 (Sign) w25: v1(2313.52,1655) 2309.37,1655 2294.72,1669.64 2294.72,1794.42 2345,1844.69 v1(2345,2235)
  Bottom Layer w15: v1(2313.52,1655) 2313.99,1654.53 2356.77,1654.53 U4.16@2357.24,1654.06
TXLED#: 
UART_RX_3V3: 
UART_TX_3V3: 
USB2_1.DATA_N: 
USB2_1.DATA_P: 
USB2_2.DATA_N: 
USB2_2.DATA_P: 
USB2DN1.DATA_N: 
USB2DN1.DATA_P: 
USB2DN2.DATA_N: 
USB2DN2.DATA_P: 
USB2DN3.DATA_N: 
USB2DN3.DATA_P: 
USB2DN4.DATA_N: 
USB2DN4.DATA_P: 
USB2UP.DATA_N: 
USB2UP.DATA_P: 
USB3_1.RX_N: 
USB3_1.RX_P: 
USB3_1.TX_N: 
USB3_1.TX_P: 
USB3_2.RX_N: 
USB3_2.RX_P: 
USB3_2.TX_N: 
USB3_2.TX_P: 
USB3DN1.RX_N: 
USB3DN1.RX_P: 
USB3DN1.TX_N: 
USB3DN1.TX_P: 
USB3DN2.RX_N: 
USB3DN2.RX_P: 
USB3DN2.TX_N: 
USB3DN2.TX_P: 
USB3DN3.RX_N: 
USB3DN3.RX_P: 
USB3DN3.TX_N: 
USB3DN3.TX_P: 
USB3DN4.RX_N: 
USB3DN4.RX_P: 
USB3DN4.TX_N: 
USB3DN4.TX_P: 
USB3UP.RX_N: 
USB3UP.RX_P: 
USB3UP.TX_N: 
USB3UP.TX_P: 
USB_5V: 
USBD_N: 
USBD_P: 
VBAT: C32.2 C33.2 C34.2 C35.2 Q5.3 R19.2 | length 101.9
  Top Layer w10: 1577.24,2138.35 C32.2@1581.85,2142.95
  Top Layer w25: R19.2@1481.85,2167.66 C32.2@1577.24,2167.66
  other v1: 1600,2295 1700,2295 1800,2295 1900,2295 2000,2295 1550,2345 1650,2345 1750,2345 1850,2345 1950,2345
VBAT_CON: 
VDD: C45.2 C46.2 D5.2 R24.1 U4.14 | length 259.1
  Top Layer w10: C45.2@2180,1585 2185.39,1585 2205,1604.61 D5.2@2205,1670.08
  Bottom Layer w10: v1(2294.78,1597.62) 2294.89,1597.51 2294.89,1570.11 v1(2295,1570) 2298.25,1570 2309.74,1558.51 2313.24,1558.51 2320.32,1551.44 R24.1@2320.32,1520 ; v1@2295,1600 2297.3,1602.3 2329.92,1602.3 2336.75,1609.12 2339.28,1609.12 2344.72,1614.57 2357.13,1614.57 U4.14@2357.24,1614.68
pads on no net: U4.7 U4.19 U4.20 U4.21 U4.22

## Polygon pours and split planes (outlines as drawn)
no net on Int1 (GND) (split plane): 6979.9,1020.1 1020.1,1020.1 1020.1,4979.9 6979.9,4979.9
no net on Int3 (GND) (split plane): 6979.9,1020.1 1020.1,1020.1 1020.1,4979.9 6979.9,4979.9
no net on Int4 (PWR) (split plane): 6979.9,1020.1 1020.1,1020.1 1020.1,4979.9 6979.9,4979.9
no net on Int5 (PWR) (split plane): 6979.9,1020.1 1020.1,1020.1 1020.1,4979.9 6979.9,4979.9
no net on Int6 (GND) (split plane): 6979.9,1020.1 1020.1,1020.1 1020.1,4979.9 6979.9,4979.9
no net on Int8 (GND) (split plane): 6979.9,1020.1 1020.1,1020.1 1020.1,4979.9 6979.9,4979.9

## Other copper
Top Layer:
  region net 3V3: 2865,1925 2865,2300 2635,2300 2635,1925
  region net GND: 1515,2100 2115,2100 2115,1980 2115,1970 2000,1970 2000,1890 1515,1890
  region net VBAT: 1515,2375 2260,2375 2260,2130 1515,2130
  region net SW: 2270,2265 2560,2265 2560,1925 2270,1925
  region net GND: 2885,2300 3100,2300 3100,1915 2885,1915
  region net GND: 2140,1542.5 2295,1542.5 2295,1460 2140,1460
  region net VDD: 2140,1615 2310,1615 2310,1555 2140,1555
Bottom Layer:
  region net GND: 2380,1695 2485,1695 2485,1595 2380,1595